# Altium PCB TRACTIAN-HW-Challenge.PcbDoc
Units mil, origin at the board's own origin, x right, y up, seen from the top; angles counter-clockwise.
Board outline 1033.83 x 2067.35 mil, 4 copper layers (Top Layer, VCC, GND, Bottom Layer), stack 61.575 mil thick; 56 components, 43 nets, 198 pads, 68 vias.
Unrouted connection lines stored in the file: 27.
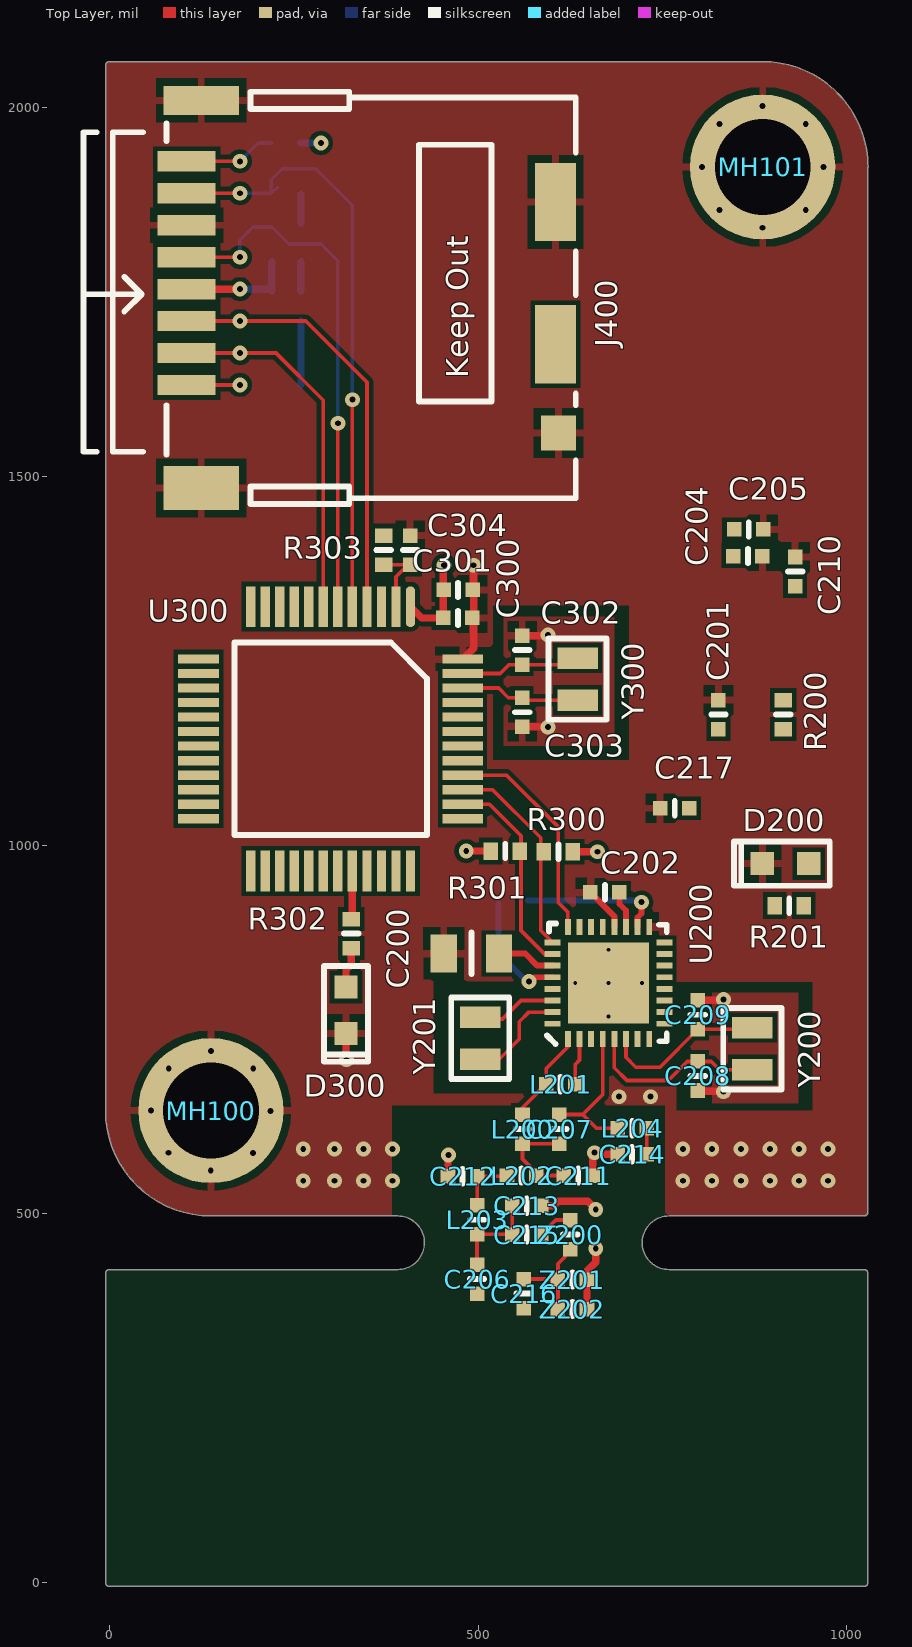
[diagram p0: Top Layer view]
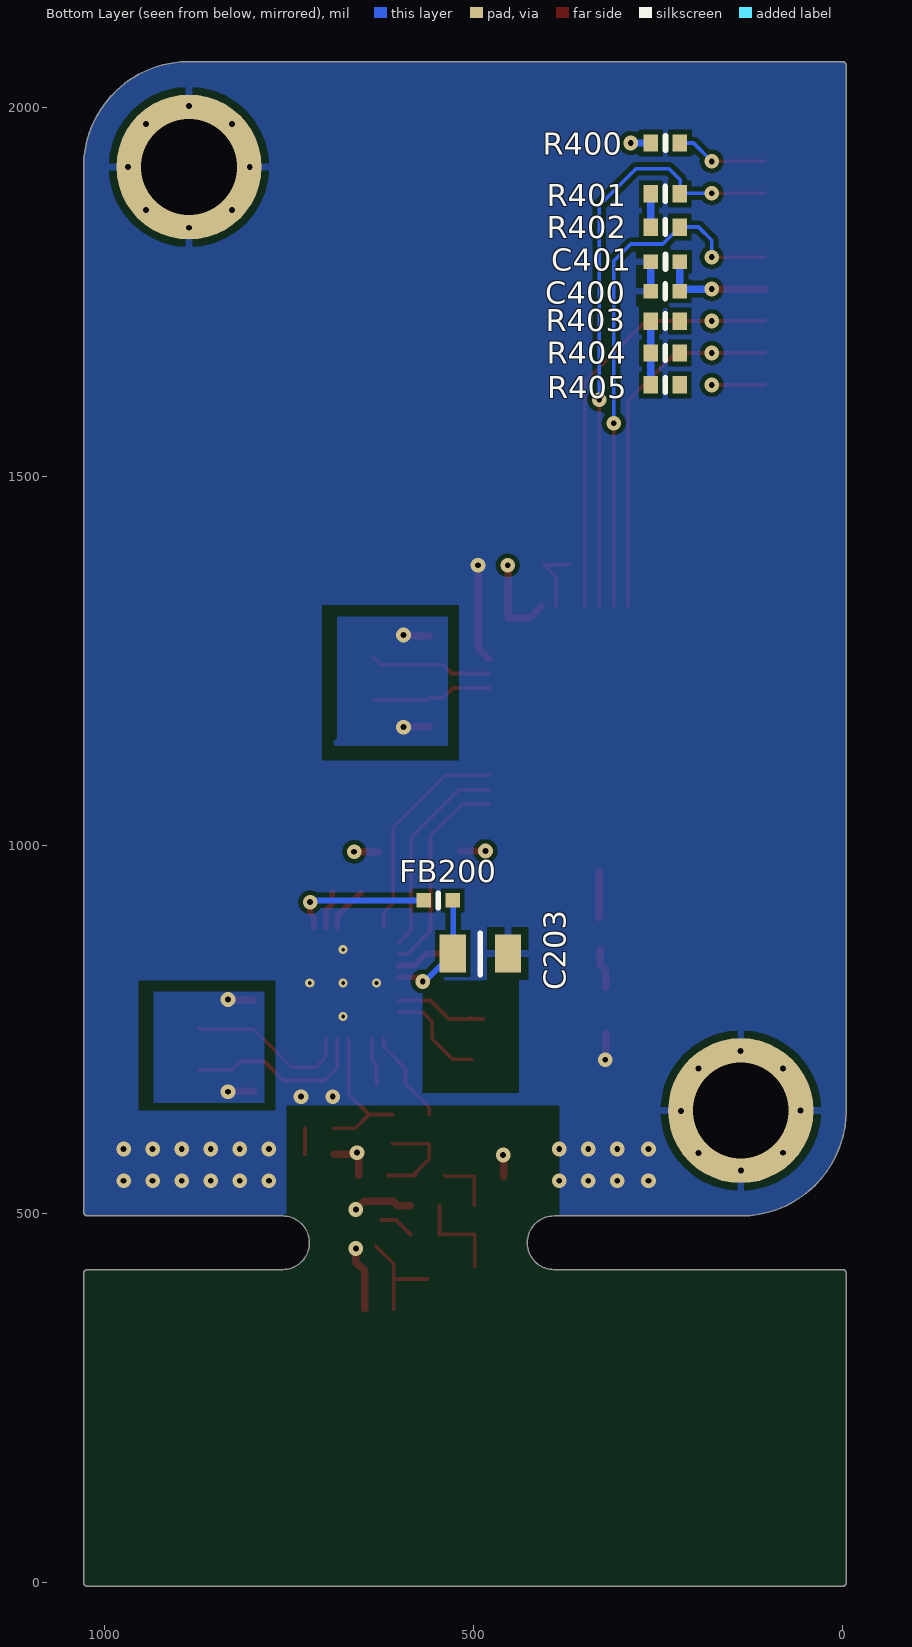
[diagram p1: Bottom Layer view, seen from below]
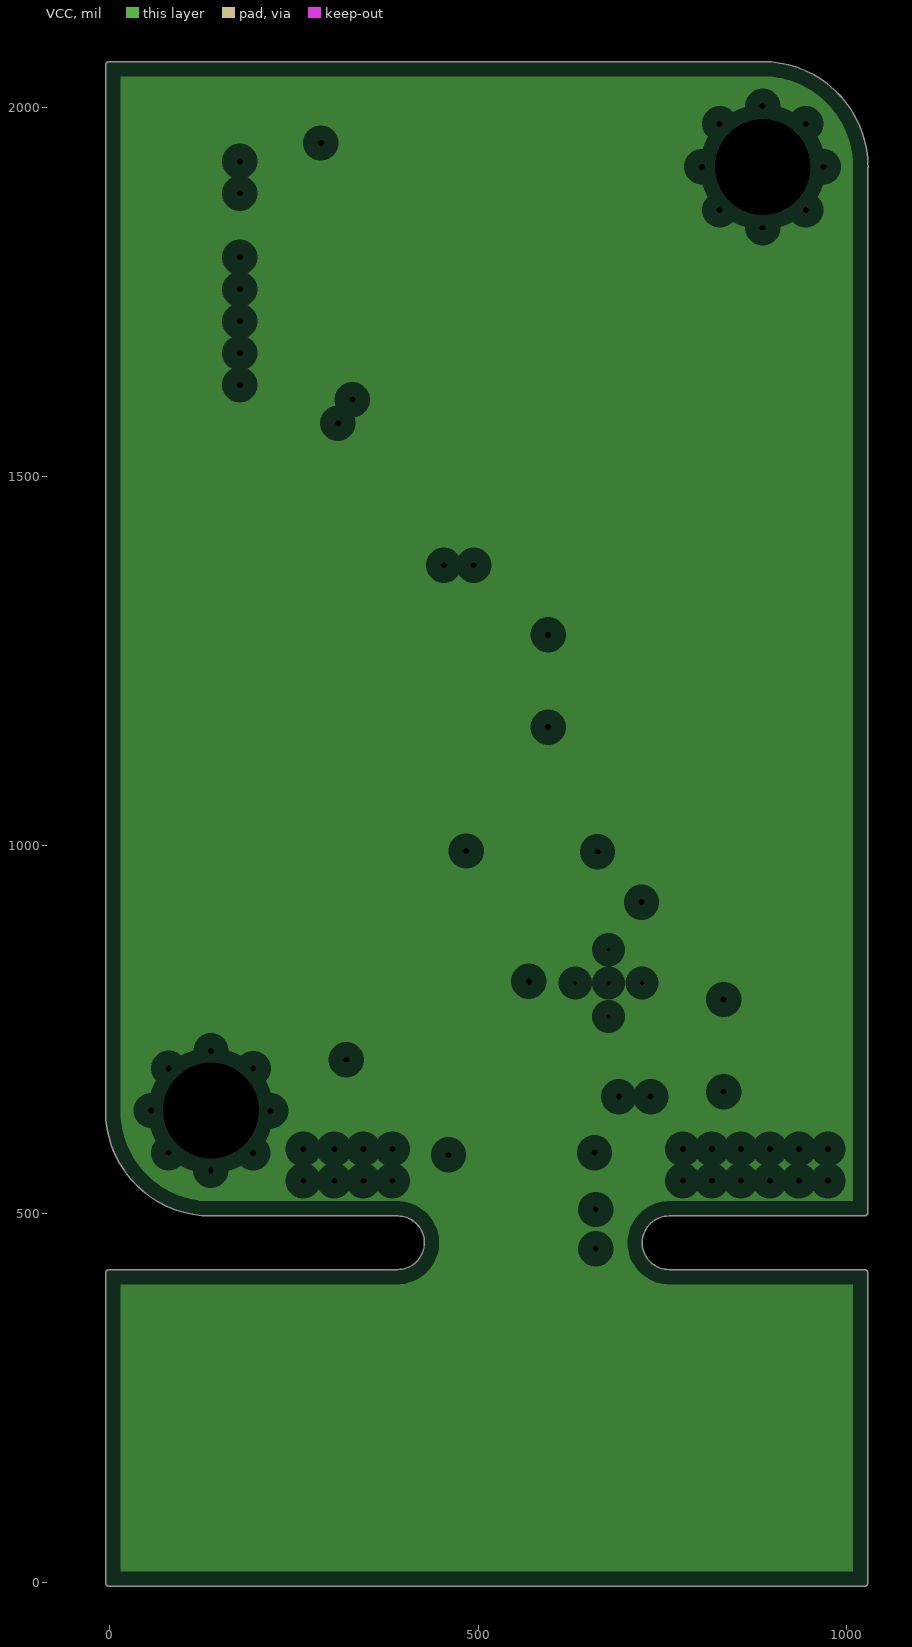
[diagram p2: VCC, clearances drawn from the general rule]
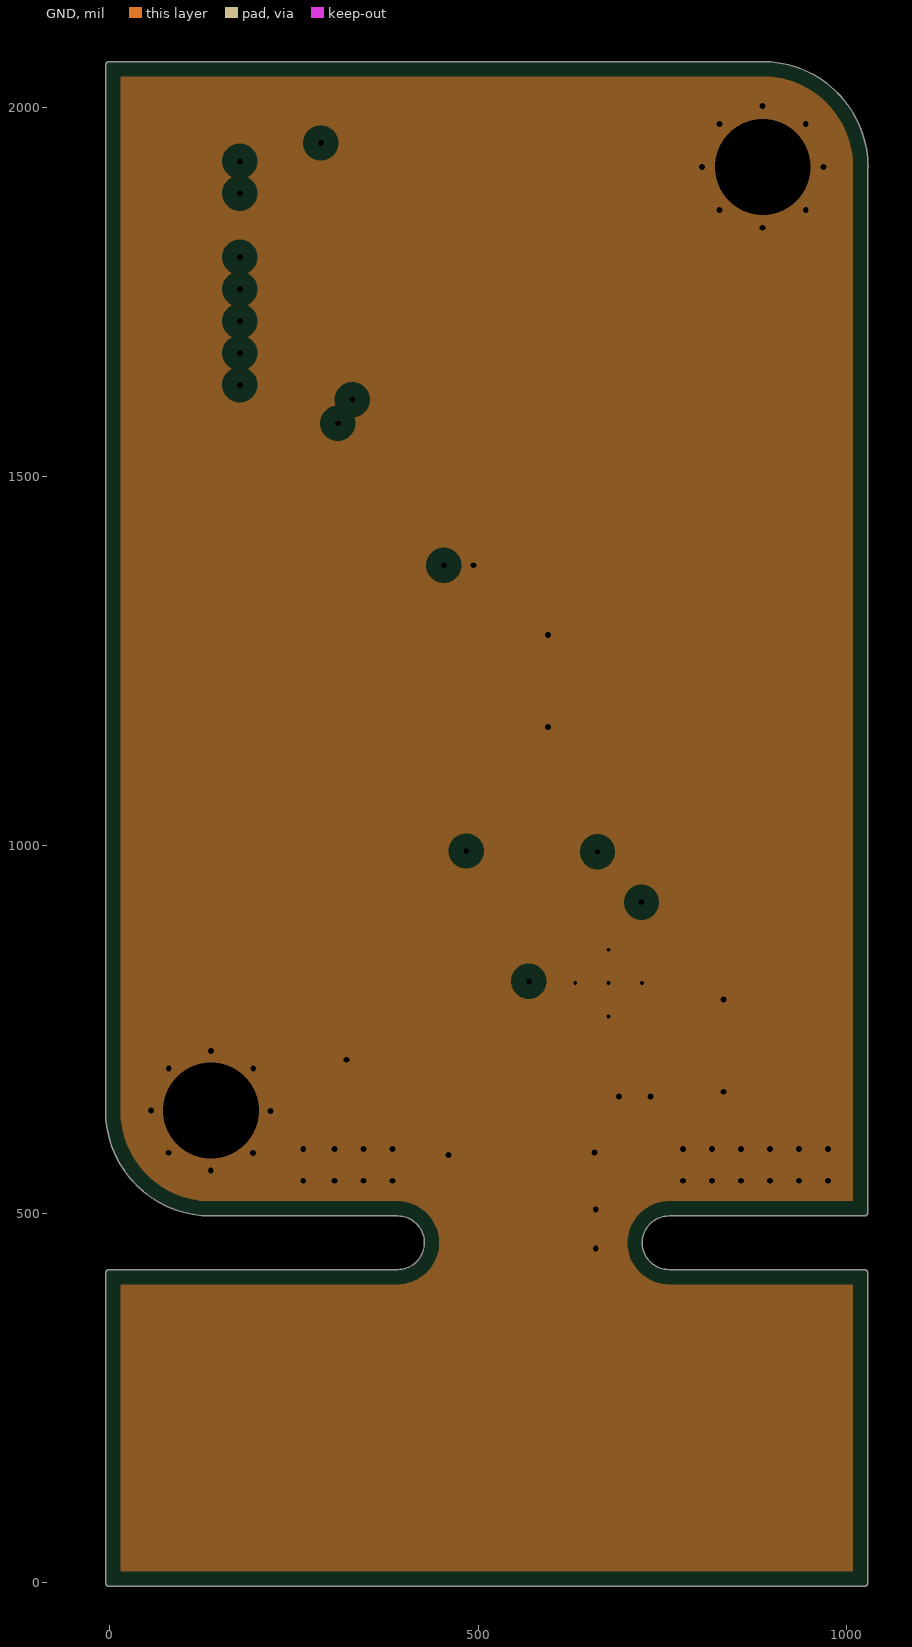
[diagram p3: GND, clearances drawn from the general rule]

## Layer stack, top to bottom
Top Solder: solder mask 0.4, Solder Resist, Dk 3.5
Top Layer: signal copper 1.6535
Dielectric 1: prepreg 10, FR-4, Dk 4.2
VCC: plane copper 1.4173
Dielectric 3: core 35.4331, Dk 4.2
GND: plane copper 1.4173, net GND
Dielectric 2: prepreg 10, Dk 4.2
Bottom Layer: signal copper 1.6535
Bottom Solder: solder mask 0.4, Solder Resist, Dk 3.5

## Board outline
-5.01,0 ccw(c0,0) 0,-5.01 1023.62,-5.01 ccw(c1023.62,0) 1028.64,0 1028.64,419.53 ccw(c1023.62,419.53) 1023.62,424.54 759,424.54 cw(c759,460.87) 759,497.19 1023.42,497.19 ccw(c1023.42,502.2) 1023.52,497.19 ccw(c1023.62,502.2) 1028.64,502.2 1028.64,1918.22 ccw(c1023.8,1919.53) 1028.81,1919.53 ccw(c886,1919.53) 1028.64,1926.56 1028.64,1929.38 ccw(c1023.62,1929.38) 1028.34,1931.07 ccw(c886,1919.53) 897.84,2061.85 ccw(c895.68,2057.32) 895.68,2062.34 0,2062.34 ccw(c0,2057.32) -5.02,2057.32 -5.01,640 ccw(c137.8,640) 137.8,497.19 183.2,497.19 391,497.19 cw(c391,460.87) 427.32,460.87 cw(c391,460.87) 391.04,424.54 ccw(c391,419.53) 391,424.54 0,424.54 ccw(c0,419.53) -5.01,419.53

## Design rules (kind name [scope] priority, off if disabled: settings)
Clearance [All] p1: gap=6 ignorepadtopadclearanceinfootprint=FALSE
PlaneClearance [All] p1: clearance=20
PlaneConnect [All] p1: planeconnectstyle=Relief reliefexpansion=20 reliefentries=4 reliefconductorwidth=10 reliefairgap=10
PolygonConnect [All] p1: thpad.connectstyle=Relief thpad.reliefconductorwidth=10 thpad.reliefentries=4 thpad.polygonreliefangle="90 Angle" thpad.airgapwidth=10 smdpad.connectstyle=Relief smdpad.reliefconductorwidth=10 smdpad.reliefentries=4 smdpad.polygonreliefangle="90 Angle" smdpad.airgapwidth=10 via.connectstyle=Direct via.reliefconductorwidth=10 via.reliefentries=4 via.polygonreliefangle="90 Angle" via.airgapwidth=10
RoutingVias [All] p1: holewidth=28 width=50 viastyle="Through Hole" minholewidth=5 minwidth=15 maxholewidth=28 maxwidth=50
SolderMaskExpansion [All] p1: expansion=4
Width [All] p1: maxlimit=10 minlimit=5 preferedwidth=5
28 further rules are at their usual default settings.

## Classes and differential pairs
component class TRACTIAN_Power: MH100 MH101
component class TRACTIAN_microSD: C400 C401 J400 J? R400 R401 R402 R403 R404 R405
component class TRACTIAN_Low-Power-MCU: C300 C301 C302 C303 C304 D300 R300 R301 R303 U300 Y300
component class TRACTIAN_Wireless: C200 C201 C202 C203 C204 C205 C206 C207 C208 C209 C210 C211 C212 C213 C214 C215 C216 C217 D200 FB200 L200 L201 L202 L203 L204 R200 R201 U200 Y200 Y201 Z200 Z201 Z202

## Components (designator, comment, footprint, x,y, rotation, side; value= is the part's Value field where it differs from the comment)
C200 "22u" C0805 491,853 r180 top
C201 "100n" C0402 826,1177 r90 top value=100nF
C202 "100n" C0402 672,936 r180 top value=100nF
C203 "22u" C0805 491,853 r180 bottom
C204 "100n" C0402 866,1392 r0 top value=100nF
C205 "3.6pF" C0402 867,1428 r180 top
C206 "DNP" C0402 498.69,411.68 r90 top
C207 "3.6pF" C0402 610,615 r270 top
C208 "18p" C0402 798,687 r270 top value=18pF
C209 "18p" C0402 798,770 r90 top value=18pF
C210 "1u" C0402 930,1371 r90 top value=1uF
C211 "2.7pF" C0402 636,552 r0 top
C212 "6.2pF" C0402 479,551 r180 top
C213 "3pF" C0402 566,511 r0 top
C214 "100pF" C0402 709,581 r180 top
C215 "100pF" C0402 566,472 r180 top
C216 "5.6pF" C0402 562.08,391.99 r90 top
C217 "100n" C0402 766.69,1050 r180 top value=100nF
C300 "4u7" C0402 472.68,1308 r0 top
C301 "100n" C0402 473,1346 r0 top value=100nF
C302 "18p" C0402 560.01,1264.37 r90 top value=18pF
C303 "18p" C0402 560,1180.32 r270 top value=18pF
C304 "1nF" C0402 408,1400 r90 top
C400 "4u7" C0402 240.16,1751 r0 bottom
C401 "100n" C0402 240,1791 r0 bottom value=100nF
D200 "" LED_0603 917,975 r0 top
D300 "" LED_0603 321,776.2 r90 top
FB200 "BLM15AX601SN1D" C0402 548,925 r180 bottom
J400 "DM3C-SF" uSD_DM3CS 357,1747 r0 top locked
L200 "7.5nH" L0402 560.32,615 r270 top
L201 "27nH" L0402 612,676 r0 top
L202 "6.8nH" L0402 559,552 r180 top
L203 "6.8nH" L0402 499,492 r270 top
L204 "7.5nH" L0402 709,616 r0 top
MH100 "MH_3mm" MH_3mm 1605,810 r0 top
MH101 "MH_3mm" MH_3MM 886,1919.53 r0 top
R200 "100k" R0402 914,1177 r90 top
R201 "270R" R0402 922,918 r180 top
R300 "4.7k" R0402 608.97,991 r0 top
R301 "4.7k" R0402 537,992 r180 top
R302 "270R" R0402 328,880 r90 top
R303 "100k" R0402 372,1400 r90 top
R400 "47k5" R0402 240,1952 r0 bottom
R401 "47k5" R0402 240.16,1883 r0 bottom
R402 "47k5" R0402 240.16,1838 r0 bottom
R403 "47k5" R0402 240.16,1710.58 r0 bottom
R404 "47k5" R0402 240.16,1667.28 r0 bottom
R405 "47k5" R0402 240.16,1623.97 r0 bottom
U200 "CC1310F32RSMR" VQFN-32 677,813 r90 top
U300 "MSP430FR2476TPT" LQFP-48 408.42,1323.27 r270 top locked
Y200 "32.768kHz" ABS06 872,724 r90 top
Y201 "24MHz" ABS06 503,738.21 r90 top
Y300 "32.768kHz" ABS06 635,1225 r270 top
Z200 "3.3nH" L0402 625,472 r90 top
Z201 "DNP" L0402 628.08,410.99 r0 top
Z202 "DNP" C0402 628.08,370.99 r0 top

## Footprints (in the part's own frame and the unit in brackets; to place one, negate y for a bottom-side part, rotate by r counter-clockwise, add the part's x,y. Pads: shape width x height; smd on the part's side, far side on the other; paste and mask are expansions set on the pad)
ABS06 [mm]
  rect 0.75x1.4 smd: 1(-0.725,0) 2(0.725,0)
  silkscreen extent -1.4,-1 1.4,1, body extent -1,-0.62 1,0.6, height 1
C0402 [mm]
  rect 0.5x0.5 smd: 1(-0.5,0) 2(0.5,0)
  silkscreen extent 0,-0.25 0,0.25, body extent -0.5,-0.25 0.5,0.25, height 0.56
C0805 [mm]
  rect 0.9x1.3 smd: 1(-0.95,0) 2(0.95,0)
  silkscreen extent 0,-0.72 0,0.7, body extent -1,-0.6 1,0.6, height 1.5
L0402 [mm]
  rect 0.5x0.5 smd: 1(-0.5,0) 2(0.5,0)
  silkscreen extent 0,-0.25 0,0.25, body extent -0.51,-0.38 0.51,0.38, height 0.51
LED_0603 [mm]
  rect 0.8x0.8 smd: 1(-0.8,0) 2(0.8,0)
  silkscreen extent -1.78,-0.76 1.52,0.76, body extent -0.85,-0.4 0.85,0.4, height 0.66
LQFP-48 [mm] "LQFP-48 (PT)"
  oval 1.4x0.32 smd: 1(0,0)
  rect 1.4x0.32 smd: 2(0,-0.5) 3(0,-1) 4(0,-1.5) 5(0,-2) 6(0,-2.5) 7(0,-3) 8(0,-3.5) 9(0,-4) 10(0,-4.5) 11(0,-5) 12(0,-5.5) 25(9.1,-5.5) 26(9.1,-5) 27(9.1,-4.5) 28(9.1,-4) 29(9.1,-3.5) 30(9.1,-3) 31(9.1,-2.5) 32(9.1,-2) 33(9.1,-1.5) 34(9.1,-1) 35(9.1,-0.5) 36(9.1,0)
  rect 0.32x1.4 smd: 13(1.8,-7.3) 14(2.3,-7.3) 15(2.8,-7.3) 16(3.3,-7.3) 17(3.8,-7.3) 18(4.3,-7.3) 19(4.8,-7.3) 20(5.3,-7.3) 21(5.8,-7.3) 22(6.3,-7.3) 23(6.8,-7.3) 24(7.3,-7.3) 37(7.3,1.8) 38(6.8,1.8) 39(6.3,1.8) 40(5.8,1.8) 41(5.3,1.8) 42(4.8,1.8) 43(4.3,1.8) 44(3.8,1.8) 45(3.3,1.8) 46(2.8,1.8) 47(2.3,1.8) 48(1.8,1.8)
  silkscreen extent 1.23,-6.06 7.86,0.57, body extent 0.05,-7.25 9.05,1.75, height 1.6
MH_3mm [mm]
  round 5 hole 3.3 unplated paste+0: 1(-37.267,-4.318)
MH_3MM [mm]
  round 5 hole 3.3 unplated paste+0: 1(0,0)
R0402 [mm]
  rect 0.5x0.6 smd: 1(-0.5,0) 2(0.5,0)
  silkscreen extent 0,-0.25 0,0.25, body extent -0.5,-0.25 0.5,0.25, height 0.4
uSD_DM3CS [mm] "Creator MM"
  rect 2x0.7 smd: 1(-6.4,-3.125) 2(-6.4,-2.025) 3(-6.4,-0.925) 4(-6.4,0.175) 5(-6.4,1.275) 6(-6.4,2.375) 7(-6.4,3.475) 8(-6.4,4.575)
  rect 1.4x2.7 smd: 9(6.3,-1.725) 13(6.3,3.175)
  rect 2.6x1.5 smd: 10(-5.9,-6.675)
  rect 2.6x1 smd: 11(-5.9,6.675)
  rect 1.2x1.2 smd: 12(6.4,-4.775)
  silkscreen extent -9.95,-7.22 7,6.97, body extent -7.1,-7.02 7,6.78, height 1.98
VQFN-32 [mm] "4x4x1 mm"
  rect 0.55x0.2 smd mask+0.025: 1(-1.925,1.4) 2(-1.925,1) 3(-1.925,0.6) 4(-1.925,0.2) 5(-1.925,-0.2) 6(-1.925,-0.6) 7(-1.925,-1) 8(-1.925,-1.4) 17(1.925,-1.4) 18(1.925,-1) 19(1.925,-0.6) 20(1.925,-0.2) 21(1.925,0.2) 22(1.925,0.6) 23(1.925,1) 24(1.925,1.4)
  rect 0.2x0.55 smd mask+0.025: 9(-1.4,-1.925) 10(-1,-1.925) 11(-0.6,-1.925) 12(-0.2,-1.925) 13(0.2,-1.925) 14(0.6,-1.925) 15(1,-1.925) 16(1.4,-1.925) 25(1.4,1.925) 26(1,1.925) 27(0.6,1.925) 28(0.2,1.925) 29(-0.2,1.925) 30(-0.6,1.925) 31(-1,1.925) 32(-1.4,1.925)
  rect 2.8x2.8 smd paste-10 mask+0.025: 33(0,0)
  silkscreen extent -2.1,-2 2.05,2.12, body extent -2,-2 2.01,2.01, height 0.95

## Part data
C200 C203: library part C2012X5R1C226K, "CAP CER 22UF 16V 10% X5R 0805", Capacitance=22µF, Manufacturer="TDK Corporation", Operating Temperature="-55°C ~ 85°C", Package / Case="0805 (2012 Metric)", Ratings=-, Supplier Part Number 1=445-6797-1-ND, Temperature Coefficient=X5R, Tolerance=±10%, Voltage - Rated=16V, .Checked PCB=RF, .Checked SCH=RF, Applications="General Purpose", Category=Capacitors, ComponentLink1Description=http://www.tdk.com/pdf/general_B11.pdf, ComponentLink1URL=http://www.tdk.com/pdf/general_B11.pdf, Features=-, Height - Seated (Max)=-, Lead Spacing=-, Lead Style=-, Manufacturer Part Number=C2012X5R1C226K, Mounting Type="Surface Mount, MLCC", Packaging="Cut Tape (CT)", Pricing 1="1=0.77, 10=0.737, 100=0.3575, 250=0.297, 500=0.2695, 1000=0.2475 (USD)", RoHS="RoHS Compliant", Size / Dimension="0.079\" L x 0.049\" W (2.00mm x 1.25mm)", Stock 1=15408, Supplier 1=Digi-Key, Thickness (Max)="0.057\" (1.45mm)"
C201 C202 C204 C217 C301 C401: library part C1005X5R1H104K, "CAP CER .10UF 50V X5R 10% 0402", Capacitance=0.1µF, Manufacturer="TDK Corporation", Operating Temperature="-55°C ~ 85°C", Package / Case="0402 (1005 Metric)", Ratings=-, Supplier Part Number=445-5942-1-ND, Temperature Coefficient=X5R, Tolerance=±10%, Voltage - Rated=50V, .Checked PCB=used, .Checked SCH=used, Applications="General Purpose", Category=Capacitors, ComponentLink1Description=http://www.tdk.co.jp/tefe02/e412_c.pdf, ComponentLink1URL=http://www.tdk.co.jp/tefe02/e412_c.pdf, Features=-, Height - Seated (Max)=-, Lead Spacing=-, Lead Style=-, Manufacturer Part Number=C1005X5R1H104K, Mounting Type="Surface Mount, MLCC", Packaging="Cut Tape (CT)", Price 1k [$]=0.02340, Pricing 1="1=0.27, 10=0.18, 100=0.072, 250=0.05176, 500=0.0369, 1000=0.027 (USD)", RoHS="RoHS Compliant", Size / Dimension="0.039\" L x 0.020\" W (1.00mm x 0.50mm)", Stock 1=106926, Supplier=Digikey, Supplier 1=Digi-Key, Supplier Part Number 1=445-5942-1-ND, Thickness (Max)="0.022\" (0.55mm)"
C205 C206 C207 C211 C212 C213 C214 C215 C216 C304 Z202: library part Cap, "CAPACITOR", ComponentLink1Description=http://www.vishay.com/doc?34104, ComponentLink1URL=http://www.vishay.com/doc?34104
C208 C209 C302 C303: library part C1005C0G1H180J, "CAP CER 18PF 50V C0G 5% 0402", Capacitance=18pF, Manufacturer="TDK Corporation", Operating Temperature="-55°C ~ 125°C", Package / Case="0402 (1005 Metric)", Ratings=-, Supplier Part Number=445-1238-1-ND, Temperature Coefficient="C0G, NP0", Tolerance=±5%, Voltage - Rated=50V, .Checked PCB=used, .Checked SCH=used, Applications="General Purpose", Category=Capacitors, ComponentLink1Description=http://www.tdk.co.jp/tefe02/e412_c.pdf, ComponentLink1URL=http://www.tdk.co.jp/tefe02/e412_c.pdf, Features=-, Height - Seated (Max)=-, Lead Spacing=-, Lead Style=-, Manufacturer Part Number=C1005C0G1H180J, Mounting Type="Surface Mount, MLCC", Packaging="Cut Tape (CT)", Price 1k [$]=0.00468, Pricing 1="1=0.08, 10=0.05, 100=0.018, 250=0.013, 500=0.0096, 1000=0.0065 (USD)", RoHS="RoHS Compliant", Size / Dimension="0.039\" L x 0.020\" W (1.00mm x 0.50mm)", Stock 1=24321, Supplier=Digikey, Supplier 1=Digi-Key, Supplier Part Number 1=445-1238-1-ND, Thickness (Max)="0.022\" (0.55mm)"
C210: library part C1005X5R1C105K, "CAP CER 1.0UF 16V X5R 0402", Capacitance=1.0µF, Manufacturer="TDK Corporation", Operating Temperature="-55°C ~ 85°C", Package / Case="0402 (1005 Metric)", Ratings=-, Supplier Part Number=445-4978-1-ND, Temperature Coefficient=X5R, Tolerance=±10%, Voltage - Rated=16V, .Checked PCB=used, .Checked SCH=used, Applications="General Purpose", Category=Capacitors, ComponentLink1Description=http://www.tdk.co.jp/tefe02/e412_c.pdf, ComponentLink1URL=http://www.tdk.co.jp/tefe02/e412_c.pdf, Features=-, Height - Seated (Max)=-, Lead Spacing=-, Lead Style=-, Manufacturer Part Number=C1005X5R1C105K, Mounting Type="Surface Mount, MLCC", Packaging="Cut Tape (CT)", Price 1k [$]=0.02080, Pricing 1="1=0.24, 10=0.16, 100=0.064, 250=0.046, 500=0.0328, 1000=0.024 (USD)", RoHS="RoHS Compliant", Size / Dimension="0.039\" L x 0.020\" W (1.00mm x 0.50mm)", Stock 1=341010, Supplier=Digikey, Supplier 1=Digi-Key, Supplier Part Number 1=445-4978-1-ND, Thickness (Max)="0.022\" (0.55mm)"
C300 C400: library part C1005X5R1A475M, "CAP CER 4.7UF 10V 20% X5R 0402", Capacitance=4.7µF, Manufacturer="TDK Corporation", Operating Temperature="-55°C ~ 85°C", Package / Case="0402 (1005 Metric)", Ratings=-, Supplier Part Number 1=445-8023-1-ND, Temperature Coefficient=X5R, Tolerance=±20%, Voltage - Rated=10V, .Checked PCB=RF, .Checked SCH=RF, Applications="General Purpose", Category=Capacitors, ComponentLink1Description=http://www.tdk.com/pdf/general_B11.pdf, ComponentLink1URL=http://www.tdk.com/pdf/general_B11.pdf, Features=-, Height - Seated (Max)=-, Lead Spacing=-, Lead Style=-, Manufacturer Part Number=C1005X5R1A475M, Mounting Type="Surface Mount, MLCC", Packaging="Cut Tape (CT)", Pricing 1="1=0.53, 10=0.415, 100=0.25, 250=0.18752, 500=0.16, 1000=0.125, 5000=0.095 (USD)", RoHS="RoHS Compliant", Size / Dimension="0.039\" L x 0.020\" W (1.00mm x 0.50mm)", Stock 1=10140, Supplier 1=Digi-Key, Thickness (Max)=-
D200 D300: library part LED, "Generic LED 0603"
FB200: "FERRITE CHIP 600 OHM 0402 420mA", Current Rating=420mA, DC Resistance (DCR)="340 mOhm Max", Impedance @ Frequency="600 Ohm @ 100MHz", Manufacturer="Murata Electronics North America", Package / Case="0402 (1005 Metric)", Supplier Part Number=490-5441-1-ND, .Checked PCB=used, .Checked SCH=used, Category=Filters, ComponentLink1Description=http://search.murata.co.jp/Ceramy/image/img/PDF/ENG/L0110S0100BLM15AX_SN.pdf, ComponentLink1URL=http://search.murata.co.jp/Ceramy/image/img/PDF/ENG/L0110S0100BLM15AX_SN.pdf, Filter Type="Differential Mode - Single", Height (Max)="0.022\" (0.55mm)", Manufacturer Part Number=BLM15AX601SN1D, Mounting Type="Surface Mount", Number of Lines=1, Packaging="Cut Tape (CT)", Price 1k [$]=0.03280, Pricing 1="1=0.26, 10=0.197, 50=0.1148, 100=0.0918, 250=0.0656, 500=0.0446, 1000=0.03608, 5000=0.02821 (USD)", RoHS="RoHS Compliant", Size / Dimension="0.039\" L x 0.020\" W (1.00mm x 0.50mm)", Stock 1=34008, Supplier=Digikey, Supplier 1=Digi-Key, Supplier Part Number 1=490-5441-1-ND
J400: "CONN MICRO SD R/A HING TYPE SMD", Manufacturer="Hirose Electric Co Ltd", Supplier Part Number 1=HR1940CT-ND, .Checked PCB=MM, .Checked SCH=MM, .Creator=MM, Card Type="Secure Digital - microSD™", Category="Connectors, Interconnects", ComponentLink1Description=http://www.hirose.co.jp/cataloge_hp/e60900232.pdf, ComponentLink1URL=http://www.hirose.co.jp/cataloge_hp/e60900232.pdf, Connector Type="Connector and Ejector", Contact Finish=Gold, Contact Finish Thickness=-, Ejector Side=-, Features=Switch, Height Above Board="0.072\" (1.83mm)", Insertion, Removal Method="Hinged Lid", Manufacturer Part Number=DM3C-SF, Mounting Feature="Normal, Standard - Top", Mounting Type="Surface Mount, Right Angle", Number of Positions="10 (8 + 2)", Packaging="Cut Tape (CT)", Pricing 1="1=2.36, 10=1.96, 25=1.8152, 50=1.6368, 100=1.452, 250=1.2738, 500=1.1616 (USD)", RoHS="RoHS Compliant", Stock 1=87, Supplier 1=Digi-Key
L200 L201 L202 L203 L204 Z200 Z201: library part Ind, "INDUCTOR", ComponentLink1Description=http://www.vishay.com/doc?34104, ComponentLink1URL=http://www.vishay.com/doc?34104
R200 R303: library part RMCF0402FT100K, "RES 100K OHM 1/16W 1% 0402 SMD", Manufacturer="Stackpole Electronics Inc", Package / Case="0402 (1005 Metric)", Power (Watts)="0.063W, 1/16W", Resistance (Ohms)=100K, Supplier Part Number=RMCF0402FT100KCT-ND, Temperature Coefficient=±100ppm/°C, Tolerance=±1%, .Checked PCB=used, .Checked SCH=used, Category=Resistors, ComponentLink1Description=http://www.seielect.com/Catalog/SEI-RMCF.pdf, ComponentLink1URL=http://www.seielect.com/Catalog/SEI-RMCF.pdf, Composition="Thick Film", Features=-, Height="0.016\" (0.40mm)", Manufacturer Part Number=RMCF0402FT100K, Number of Terminations=2, Packaging="Cut Tape (CT)", Price 1k [$]=0.00384, Pricing 1="1=0.04, 10=0.025, 50=0.0138, 100=0.0105, 250=0.0078, 500=0.00576, 1000=0.00384 (USD)", RoHS="RoHS Compliant", Size / Dimension="0.039\" L x 0.020\" W (1.00mm x 0.50mm)", Stock 1=95, Supplier=Digikey, Supplier 1=Digi-Key, Supplier Part Number 1=RMCF0402FT100KCT-ND
R201 R300 R301 R302: library part Res, "Generic resistor"
R400 R401 R402 R403 R404 R405: library part RC0402FR-0747K5L, "RES 47.5K OHM 1/16W 1% 0402 SMD", Manufacturer=Yageo, Package / Case="0402 (1005 Metric)", Power (Watts)="0.063W, 1/16W", Resistance (Ohms)=47.5K, Supplier Part Number 1=311-47.5KLRCT-ND, Temperature Coefficient=±100ppm/°C, Tolerance=±1%, .Checked PCB=RF, .Checked SCH=RF, Category=Resistors, ComponentLink1Description=http://www.yageo.com/documents/recent/PYu-RC0402_51_RoHS_L_6.pdf, ComponentLink1URL=http://www.yageo.com/documents/recent/PYu-RC0402_51_RoHS_L_6.pdf, Composition="Thick Film", Features=-, Height="0.016\" (0.40mm)", Manufacturer Part Number=RC0402FR-0747K5L, Number of Terminations=2, Packaging="Cut Tape (CT)", Pricing 1="10=0.014, 100=0.0063, 500=0.00382, 1000=0.0027, 5000=0.00203 (USD)", RoHS="RoHS Compliant", Size / Dimension="0.039\" L x 0.020\" W (1.00mm x 0.50mm)", Stock 1=59607, Supplier 1=Digi-Key
  R402 R403 R404: Assembly=DNP
U200: "CC1310 SimpleLink™ Ultra-Low-Power Sub-1 GHz Wireless MCU", Manufacturer Name="Texas Instruments", Digikey PN=296-50997-1-ND, Mouser PN=595-CC1310F32RGZR, PN=CC1310F32RGZR
U300: "MCU 16-BIT ULTRA-LOW-POWER MSP430FR2476TPT LQFP-48", Digikey PN=296-MSP430FR2476TPTTR-ND, Mouser PN=595-MSP430FR2476TPT, PN=MSP430FR2476TPT
Y200 Y300: library part ABS06-32.768KHZ-9-1-T, "CRYSTAL 32.768 KHZ 9.0 PF SMD", Frequency Stability=±10ppm, Load Capacitance=9pF, Manufacturer="Abracon Corporation", Operating Mode=Fundamental, Operating Temperature="-40°C ~ 85°C", Package / Case="2-SMD, No Lead (DFN, LCC)", Supplier Part Number=535-10247-1-ND, .Checked PCB=used, .Checked SCH=used, Category="Crystals and Oscillators", ComponentLink1Description=http://www.abracon.com/Resonators/ABS06.pdf, ComponentLink1URL=http://www.abracon.com/Resonators/ABS06.pdf, Frequency=32.768kHz, Frequency Tolerance=±10ppm, Height="0.024\" (0.60mm)", Manufacturer Part Number=ABS06-32.768KHZ-9-1-T, Mounting Type="Surface Mount", Packaging="Cut Tape (CT)", Price 1k [$]=1.24500, Pricing 1="1=2.81, 10=2.438, 50=2.1376, 100=1.6875, 500=1.425 (USD)", RoHS="RoHS Compliant", Size / Dimension="0.079\" L x 0.047\" W (2.00mm x 1.20mm)", Stock 1=5693, Supplier=Digikey, Supplier 1=Digi-Key, Supplier Part Number 1=535-10247-1-ND, Type="kHz Crystal (Tuning Fork)"
Y201: library part ABM7-24.000MHZ-D-2-Y-T, "CRYSTAL 24.0000MHZ 18PF SMD", ESR (Equivalent Series Resistance)="50 Ohm", Frequency Stability=±30ppm, Frequency Tolerance=±20ppm, Load Capacitance=18pF, Manufacturer="Abracon Corporation", Operating Mode=Fundamental, Operating Temperature="-40°C ~ 85°C", Package / Case=2-SMD, Ratings=-, Supplier Part Number 1=535-9845-1-ND, .Checked PCB="RF, used by MM", .Checked SCH="MM, checked by RF", .Creator=MM, Category="Crystals and Oscillators", ComponentLink1Description=http://www.abracon.com/Resonators/abm7.pdf, ComponentLink1URL=http://www.abracon.com/Resonators/abm7.pdf, Frequency=24MHz, Height="0.055\" (1.40mm)", Manufacturer Part Number=ABM7-24.000MHZ-D-2-Y-T, Mounting Type="Surface Mount", Packaging="Cut Tape (CT)", Pricing 1="1=1.31, 10=1.138, 50=0.9976, 100=0.7875, 500=0.665 (USD)", RoHS="RoHS Compliant", Size / Dimension="0.236\" L x 0.138\" W (6.00mm x 3.50mm)", Stock 1=53059, Supplier 1=Digi-Key, Type="MHz Crystal"

## Via types
v1: diameter 20, hole 8, Top Layer to Bottom Layer, 63 vias
v2: diameter 12.4, hole 5, Top Layer to Bottom Layer, 5 vias

## Nets (pads, with @x,y where several pads share a name; then routed paths per layer and width w, separated by ;. In a path a pad name is that pad's centre, name@x,y a point inside that pad or via, vN(x,y) a via of type N, cw(c..) or ccw(c..) an arc to the next point about the centre after c; other vN are vias at no path point)
3V3_VDD_MCU: C200.1 C201.1 C202.1 C300.1 C301.1 C400.1 C401.1 J400.4 R200.2 R300.2 R301.2 R303.2 R400.2 R401.2 R402.2 R403.2 R404.2 R405.2 U200.11 U200.19 U200.27 U300.1 | length 630.2
  Top Layer w5: v1@453,1378.68 v1(453.79,1379.47)
  Top Layer w7.87: C200.1 564,853 580.38,836.62 U200.27 ; C202.1 691.68,920.32 700.62,911.38 U200.19
  Top Layer w10: J400.4 v1(177.17,1753.89) ; U300.1 423.69,1308 C300.1 v1@453,1378.68 ; v1(484,992) R301.2 ; R300.2 v1(662,991)
  Bottom Layer w5: C400.1@217.58,1753.89 C400.1 ; C401.1 C401.1@220.47,1790.84
  Bottom Layer w10: v1(177.17,1753.89) C400.1@217.58,1753.89 ; C400.1 C401.1@220.47,1790.84 ; R400.2 v1(287,1952) ; R405.2@260,1623.97 R403.2@260,1710.43 ; R402.2@260,1843 R401.2@260,1882.84
ANTENNA: C216.1
Card_detect: J400.9 U300.8
CONN_SMA: C206.1
DCDC_SW: FB200.1 U200.18 | length 191.1
  Top Layer w7.87: U200.18 716.37,901.86 721.69,907.17 v1(721.69,922.69)
  Bottom Layer w5: v1@719.37,925 v1(721.69,922.69)
  Bottom Layer w7.87: FB200.1 v1@719.37,925
GND: C200.2 C201.2 C202.2 C203.2 C204.2 C205.1 C208.2 C209.2 C210.2 C211.2 C212.2 C213.2 C214.2 C217.2 C300.2 C301.2 C302.2 C303.2 C304.2 C400.2 C401.2 D200.1 D300.1 J400.6 J400.10 J400.11 J400.12 J400.13 MH100.1 MH101.1 U200.3 U200.7 U200.17 U200.20 U200.29 U200.33 U300.48 Z201.2 Z202.2 | length 668.3
  Top Layer w5: v1@321,709.54 v1(321.54,709) ; v1@459.31,579.31 v1(460,580) ; v1@594.05,1284.05 v1(595,1285) ; v1@594.37,1160.63 v1(595,1160)
  Top Layer w7.87: C202.2 684.87,903.44 U200.20
  Top Layer w10: v1@321,709.54 D300.1 ; C212.2 v1@459.31,579.31 ; U300.48 494,1267.11 v1(494,1379.47) ; C303.2 v1@594.37,1160.63 ; C302.2 v1@594.05,1284.05 ; C213.2 602.94,511 608.94,517 648.68,517 v1(659.68,506) ; Z202.2 Z201.2 647.77,422.77 659.68,434.68 v1(659.68,453) ; C211.2 v1@655.69,583 ; v1@658,581 C214.2 ; C208.2@798,666.31 v1@832.37,666.31 ; C209.2 v1@832.05,789.74
  Bottom Layer w10: C400.2 C401.2@259.84,1790.84
  other v1: 263,545 305.25,545 344.62,545 383.99,545 777.69,545 817.06,545 856.43,545 895.8,545 935.17,545 974.55,545 137.59,559 80.37,582.87 194.93,582.58 658,583 263,588 305.25,588 344.62,588 383.99,588 777.69,588 817.06,588 856.43,588 895.8,588 935.17,588 974.55,588 56.8,640.2 218.8,639.8 691,659 734,659 833,665.68 80.66,697.42 195.22,697.13 138,721 833,790.68 886,1837.05 827.68,1861.21 944.32,1861.21 803.53,1919.53 968.47,1919.53 827.68,1977.84 944.32,1977.84 886,2002
  other v2: 677,767.72 631.72,813 677,813 722.28,813 677,858.28
I2C0SCL: R300.1 U200.25 U300.39 | length 281.3
  Top Layer w5: U300.39 519.76,1075.24 585,1010 585,884.33 U200.25
I2C0SDA: R301.1 U200.26 U300.38 | length 281.3
  Top Layer w5: U300.38 515.45,1055.55 558.38,1012.62 558.38,884.17 590.18,852.37 U200.26
I2C_INT: U200.24 U300.40 | length 299.9
  Top Layer w5: U300.40 538.54,1094.92 608.97,1024.5 608.97,922.03 621.88,909.12 U200.24
JTAGTCKC: U200.14
JTAGTDI: U200.16
JTAGTDO: U200.15
JTAGTMSC: U200.13
LED_CC: R201.2 U200.9
LED_MSP: R302.2 U300.32 | length 66
  Top Layer w5: R302.2 R302.2@329.68,901.37
  Top Layer w10: R302.2@329.68,901.37 U300.32
NetC205_2: C205.2 L200.1 L201.1 U200.1 | length 128
  Top Layer w5: L200.1 560.32,644 L201.1 592.32,696.94 621.88,726.51 U200.1
NetC206_2: C206.2 C213.1 C215.2 L203.2 | length 129.9
  Top Layer w5: C206.2@498.69,429 498.69,472 L203.2 546,472.31 C215.2 C213.1
NetC207_1: C207.1 L204.1 U200.4 | length 200.8
  Top Layer w5: C207.1 642,634.68 ; U200.4 669.13,661.81 642,634.68 ; L204.1 660.68,616 642,634.68
NetC207_2: C207.2 C211.1 L200.2 L202.1 | length 138.9
  Top Layer w5: L202.1 C211.1 ; L202.1@582,552.68 560.32,574.37 L200.2 C207.2
NetC210_1: C210.1 U200.12
NetC212_1: C212.1 L202.2 L203.1 | length 80.5
  Top Layer w5: L203.1 499,550.68 C212.1 538.31,551 L202.2
NetC214_1: C214.1 L204.2 | length 35
  Top Layer w5: C214.1 L204.2
NetC215_1: C215.1 Z200.2 | length 47.5
  Top Layer w5: C215.1 605.37,491.69 Z200.2
NetC216_2: C216.2 Z200.1 Z201.1 Z202.1 | length 141.8
  Top Layer w5: C216.2 607.71,411.68 Z201.1 ; Z202.1 Z201.1 ; Z200.1@632.32,456.32 608.4,432.39 Z201.1
NetD200_2: D200.2 R201.1
NetD300_2: D300.2 R302.1 | length 55.8
  Top Layer w5: R302.1 R302.1@328.38,859.94
  Top Layer w10: D300.2 321,830.62 328.38,838 R302.1@328.38,859.94
NetJ400_1: J400.1 R405.1 | length 72.1
  Top Layer w5: J400.1 v1(177.17,1623.97)
NetJ400_8: J400.8 R400.1 | length 125.6
  Top Layer w5: J400.8 v1(177.17,1927.12)
  Bottom Layer w5: v1(177.17,1927.12) 202.05,1952 R400.1
NetL201_2: L201.2 U200.2 | length 63.7
  Top Layer w5: L201.2 631.69,702.69 637.63,708.63 U200.2
RESET_N: C217.1 R200.1 U200.21
RST_SBWTDIO: C304.1 R303.1 U300.2 | length 99.8
  Top Layer w5: R303.1@369,1380.32 405,1380.32 388.74,1364.06 U300.2
SBWTCK: U300.3
UCA0CLK: J400.5 R402.1 U300.6 | length 723.1
  Top Layer w5: J400.5 v1(177.17,1797.2) ; U300.6 v1(310,1572)
  Bottom Layer w5: v1(177.17,1797.2) 177.17,1820.17 195,1838 R402.1 243.47,1815 287,1815 310,1792 v1(310,1572)
UCA0SIMO: J400.3 R403.1 U300.4 | length 583.1
  Top Layer w5: J400.3 v1(177.17,1710.58) 266.42,1710.58 349.37,1627.63 U300.4
UCA0SOMI: J400.7 R401.1 U300.5 | length 825.3
  Top Layer w5: J400.7 v1(177.17,1883.81) ; U300.5 v1(329.68,1604)
  Bottom Layer w5: v1(177.17,1883.81) R401.1@219.81,1883.81 ; R401.1@228.11,1892.11 R401.1@219.81,1883.81 ; v1(329.68,1604) 329.68,1867.32 280,1917 235,1917 219.81,1901.81 R401.1@219.81,1883.81
UCA0STE: J400.2 R404.1 U300.7 | length 491.7
  Top Layer w5: J400.2 v1(177.17,1667.28) 226.21,1667.28 290.32,1603.17 U300.7
VDDR: C203.1 C204.1 FB200.2 U200.28 U200.32 | length 159.1
  Top Layer w5: v1(569,815.21) 570.46,815.21 v1@576.13,820.87
  Top Layer w7.87: v1@576.13,820.87 U200.28
  Bottom Layer w7.87: FB200.2@527.69,921 527.69,853.72 C203.1 566.19,815.21 v1(569,815.21)
X24M_N: U200.30 Y201.2 | length 127.9
  Top Layer w5: Y201.2@487,764.38 Y201.2@505.38,764.38 ; Y201.2 Y201.2@505.38,764.38 ; U200.30 558.38,789.38 533.38,764.38 Y201.2@505.38,764.38
X24M_P: U200.31 Y201.1 | length 138.5
  Top Layer w5: Y201.1 528.67,709.67 556,737 556,760.63 569,773.63 U200.31
X32K_Q1: C208.1 U200.5 Y200.1 | length 248.6
  Top Layer w5: U200.5 684.87,698.13 702,681 758,681 783.68,706.68 C208.1 816.32,706.68 827.54,695.46 Y200.1
X32K_Q2: C209.1 U200.6 Y200.2 | length 223.9
  Top Layer w5: U200.6 700.62,712.38 714,699 746.68,699 C209.1 869.77,750.32 Y200.2
XIN: C302.1 U300.47 Y300.1 | length 164.3
  Top Layer w5: U300.47 530.03,1232.72 542,1244.68 C302.1 626.14,1244.68 Y300.1
XOUT: C303.1 U300.46 Y300.2 | length 162.6
  Top Layer w5: U300.46 527.97,1213.03 541,1200 C303.1 563.54,1196.46 Y300.2
pads on no net: U200.8 U200.10 U200.22 U200.23 U300.9 U300.10 U300.11 U300.12 U300.13 U300.14 U300.15 U300.16 U300.17 U300.18 U300.19 U300.20 U300.21 U300.22 U300.23 U300.24 U300.25 U300.26 U300.27 U300.28 U300.29 U300.30 U300.31 U300.33 U300.34 U300.35 U300.36 U300.37 U300.41 U300.42 U300.43 U300.44 U300.45

## Polygon pours and split planes (outlines as drawn)
GND on Top Layer "Top Layer-GND" (solid, remove dead copper, pour order 1): -5.01,0 ccw(c0,0) 0,-5.01 1023.62,-5.01 ccw(c1023.62,0) 1028.64,0 1028.64,419.53 ccw(c1023.62,419.53) 1023.62,424.54 759,424.54 cw(c759,460.87) 759,497.19 1023.42,497.19 ccw(c1023.42,502.21) 1023.52,497.19 ccw(c1023.62,502.2) 1028.64,502.2 1028.64,1918.22 ccw(c1023.8,1919.53) 1028.81,1919.53 ccw(c886,1919.53) 1028.64,1926.56 1028.64,1929.38 ccw(c1023.62,1929.38) 1028.34,1931.07 ccw(c886,1919.53) 897.84,2061.85 ccw(c895.68,2057.32) 895.68,2062.34 0,2062.34 ccw(c0,2057.32) -5.02,2057.32 -5.01,640 ccw(c137.8,640) 137.8,497.19 183.2,497.19 391,497.19 cw(c391,460.87) 427.32,460.87 cw(c391,460.87) 391.04,424.54 ccw(c391,419.53) 391,424.54 0,424.54 ccw(c0,419.53) -5.01,419.53
GND on Bottom Layer "Top Layer-GND" (solid, remove dead copper, pour order 2): -5.01,0 ccw(c0,0) 0,-5.01 1023.62,-5.01 ccw(c1023.62,0) 1028.64,0 1028.64,419.53 ccw(c1023.62,419.53) 1023.62,424.54 759,424.54 cw(c759,460.87) 759,497.19 1023.42,497.19 ccw(c1023.42,502.21) 1023.52,497.19 ccw(c1023.62,502.2) 1028.64,502.2 1028.64,1918.22 ccw(c1023.8,1919.53) 1028.81,1919.53 ccw(c886,1919.53) 1028.64,1926.56 1028.64,1929.38 ccw(c1023.62,1929.38) 1028.34,1931.07 ccw(c886,1919.53) 897.84,2061.85 ccw(c895.68,2057.32) 895.68,2062.34 0,2062.34 ccw(c0,2057.32) -5.02,2057.32 -5.01,640 ccw(c137.8,640) 137.8,497.19 183.2,497.19 391,497.19 cw(c391,460.87) 427.32,460.87 cw(c391,460.87) 391.04,424.54 ccw(c391,419.53) 391,424.54 0,424.54 ccw(c0,419.53) -5.01,419.53
no net on VCC (split plane): 895.68,2040.99 895.68,2041.96 896.18,2041.91 896.18,2041.89 905.21,2040.82 914.67,2038.94 923.95,2036.32 933,2032.98 941.75,2028.95 950.17,2024.24 958.18,2018.88 965.76,2012.91 972.84,2006.36 979.38,1999.28 985.35,1991.71 990.71,1983.69 995.42,1975.28 999.46,1966.52 1002.79,1957.48 1005.41,1948.2 1007.29,1938.74 1008.39,1929.45 1008.41,1929.45 1008.41,1929.38 1007.29,1929.38 1008.56,1926.31 1008.64,1925.57 1008.57,1925.57 1008.69,1922.48 1007.47,1919.53 1008.67,1919.53 1008.54,1918.22 1008.54,517.29 759,517.29 758.81,517.27 752.68,516.92 746.45,515.86 740.37,514.11 734.52,511.69 728.99,508.63 723.83,504.97 719.11,500.76 714.9,496.04 711.23,490.88 708.17,485.34 705.75,479.5 704,473.42 702.94,467.18 702.59,460.87 702.94,454.55 704,448.31 705.75,442.23 708.17,436.39 711.23,430.85 714.9,425.69 719.11,420.98 723.83,416.76 728.99,413.1 734.52,410.04 740.37,407.62 746.45,405.87 752.68,404.81 758.81,404.46 759,404.45 1008.54,404.45 1008.54,15.08 15.08,15.08 15.08,404.45 390.87,404.45 390.86,403.26 391,403.2 391,404.45 391.02,404.45 391.04,404.45 391.29,404.47 397.32,404.81 403.55,405.87 409.63,407.62 415.48,410.04 421.01,413.1 426.17,416.76 430.89,420.98 435.1,425.69 438.77,430.85 441.83,436.39 444.25,442.23 446,448.31 447.06,454.55 447.4,460.67 447.42,460.87 447.4,461.06 447.06,467.18 446,473.42 444.25,479.5 441.83,485.34 438.77,490.88 435.1,496.04 430.89,500.76 426.17,504.97 421.01,508.63 415.48,511.69 409.63,514.11 403.55,515.86 397.32,516.92 391.19,517.27 391,517.29 183.21,517.29 183.2,517.29 137.8,517.29 137.13,517.22 128.16,517.57 118.58,518.71 109.13,520.59 99.85,523.21 90.8,526.54 82.04,530.58 73.63,535.29 65.61,540.65 58.04,546.62 50.96,553.16 44.41,560.24 38.44,567.82 33.09,575.83 28.38,584.25 24.34,593 21,602.05 18.38,611.33 16.5,620.79 15.37,630.36 15.02,639.34 15.08,640 15.08,2042.24 892.67,2042.24
GND on GND (split plane): 895.68,2040.99 895.68,2041.96 896.18,2041.91 896.18,2041.89 905.21,2040.82 914.67,2038.94 923.95,2036.32 933,2032.98 941.75,2028.95 950.17,2024.24 958.18,2018.88 965.76,2012.91 972.84,2006.36 979.38,1999.28 985.35,1991.71 990.71,1983.69 995.42,1975.28 999.46,1966.52 1002.79,1957.48 1005.41,1948.2 1007.29,1938.74 1008.39,1929.45 1008.41,1929.45 1008.41,1929.38 1007.29,1929.38 1008.56,1926.31 1008.64,1925.57 1008.57,1925.57 1008.69,1922.48 1007.47,1919.53 1008.67,1919.53 1008.54,1918.22 1008.54,517.29 759,517.29 758.81,517.27 752.68,516.92 746.45,515.86 740.37,514.11 734.52,511.69 728.99,508.63 723.83,504.97 719.11,500.76 714.9,496.04 711.23,490.88 708.17,485.34 705.75,479.5 704,473.42 702.94,467.18 702.59,460.87 702.94,454.55 704,448.31 705.75,442.23 708.17,436.39 711.23,430.85 714.9,425.69 719.11,420.98 723.83,416.76 728.99,413.1 734.52,410.04 740.37,407.62 746.45,405.87 752.68,404.81 758.81,404.46 759,404.45 1008.54,404.45 1008.54,15.08 15.08,15.08 15.08,404.45 390.87,404.45 390.86,403.26 391,403.2 391,404.45 391.02,404.45 391.04,404.45 391.29,404.47 397.32,404.81 403.55,405.87 409.63,407.62 415.48,410.04 421.01,413.1 426.17,416.76 430.89,420.98 435.1,425.69 438.77,430.85 441.83,436.39 444.25,442.23 446,448.31 447.06,454.55 447.4,460.67 447.42,460.87 447.4,461.06 447.06,467.18 446,473.42 444.25,479.5 441.83,485.34 438.77,490.88 435.1,496.04 430.89,500.76 426.17,504.97 421.01,508.63 415.48,511.69 409.63,514.11 403.55,515.86 397.32,516.92 391.19,517.27 391,517.29 183.21,517.29 183.2,517.29 137.8,517.29 137.13,517.22 128.16,517.57 118.58,518.71 109.13,520.59 99.85,523.21 90.8,526.54 82.04,530.58 73.63,535.29 65.61,540.65 58.04,546.62 50.96,553.16 44.41,560.24 38.44,567.82 33.09,575.83 28.38,584.25 24.34,593 21,602.05 18.38,611.33 16.5,620.79 15.37,630.36 15.02,639.34 15.08,640 15.08,2042.24 892.67,2042.24

## Other copper
Top Layer:
  pour cut-out: -5,-3.55 1027.17,-3.55 1027.17,423.07 1025.7,424.54 754,424.54 754,647 383,647 383,423.07 367.93,423.07 -5,423.07
  pour cut-out: 769,815.11 769,639.89 954,639.89 954,815.11 769,815.11 784,800.11 784,649.89 934,649.89 934,800.11 784,800.11
  pour cut-out: 541,791.21
  pour cut-out: 439,815.21 439,663.21 568,663.21 569,662.21 569,815.21 439,815.21 463,791.21 465,791.21 465,686.21 464,685.21 466,683.21 543,683.21 543,791.21 542,792.21 541,791.21 463,791.21
  pour cut-out: 520,1325 520,1115 705,1115 705,1325 520,1325 535,1310 535,1135 695,1135 685,1145 685,1310 535,1310
Bottom Layer:
  pour cut-out: 439,816 439,664 568,664 569,663 569,816 439,816 463,792 465,792 465,687 464,686 466,684 543,684 543,792 542,793 541,792 463,792
  pour cut-out: 769,815.89 769,640.68 954,640.68 954,815.89 769,815.89 784,800.89 784,650.68 934,650.68 934,800.89 784,800.89
  pour cut-out: -5,-3.55 1027.17,-3.55 1027.17,423.07 1025.7,424.54 754,424.54 754,647 383,647 383,423.07 367.93,423.07 -5,423.07
  pour cut-out: 520,1325 520,1115 705,1115 705,1325 520,1325 535,1310 535,1135 695,1135 685,1145 685,1310 535,1310

## Silkscreen, mask and mechanical layers (free items; w line width, h text height)
Mechanical 1:
  pour cut-out: 900,1230
  lines w10: 886,2057.32 cw(c886,1919.53) 1023.8,1919.53 ; 895.68,2057.32 0,2057.32 0,640 ccw(c137.8,640) 137.8,502.2 183.2,502.2 391,502.2 cw(c391,460.87) 391,419.53 0,419.53 0,0 1023.62,0 1023.62,419.53 759,419.53 cw(c759,460.87) 759,502.2 1023.42,502.2 ; 1023.62,502.2 1023.62,1929.38

## Text inside footprints (layer, text, board x,y; h text height)
J400: Top Overlay "Keep Out" at 486.92,1632.83 h30 r90